# Altium PCB PCBv2.PcbDoc
Units mm, origin at the board's own origin, x right, y up, seen from the top; angles counter-clockwise.
Board outline 110 x 98 mm, 2 copper layers (Top Layer, Bottom Layer); 74 components, 67 nets, 275 pads, 22 vias.
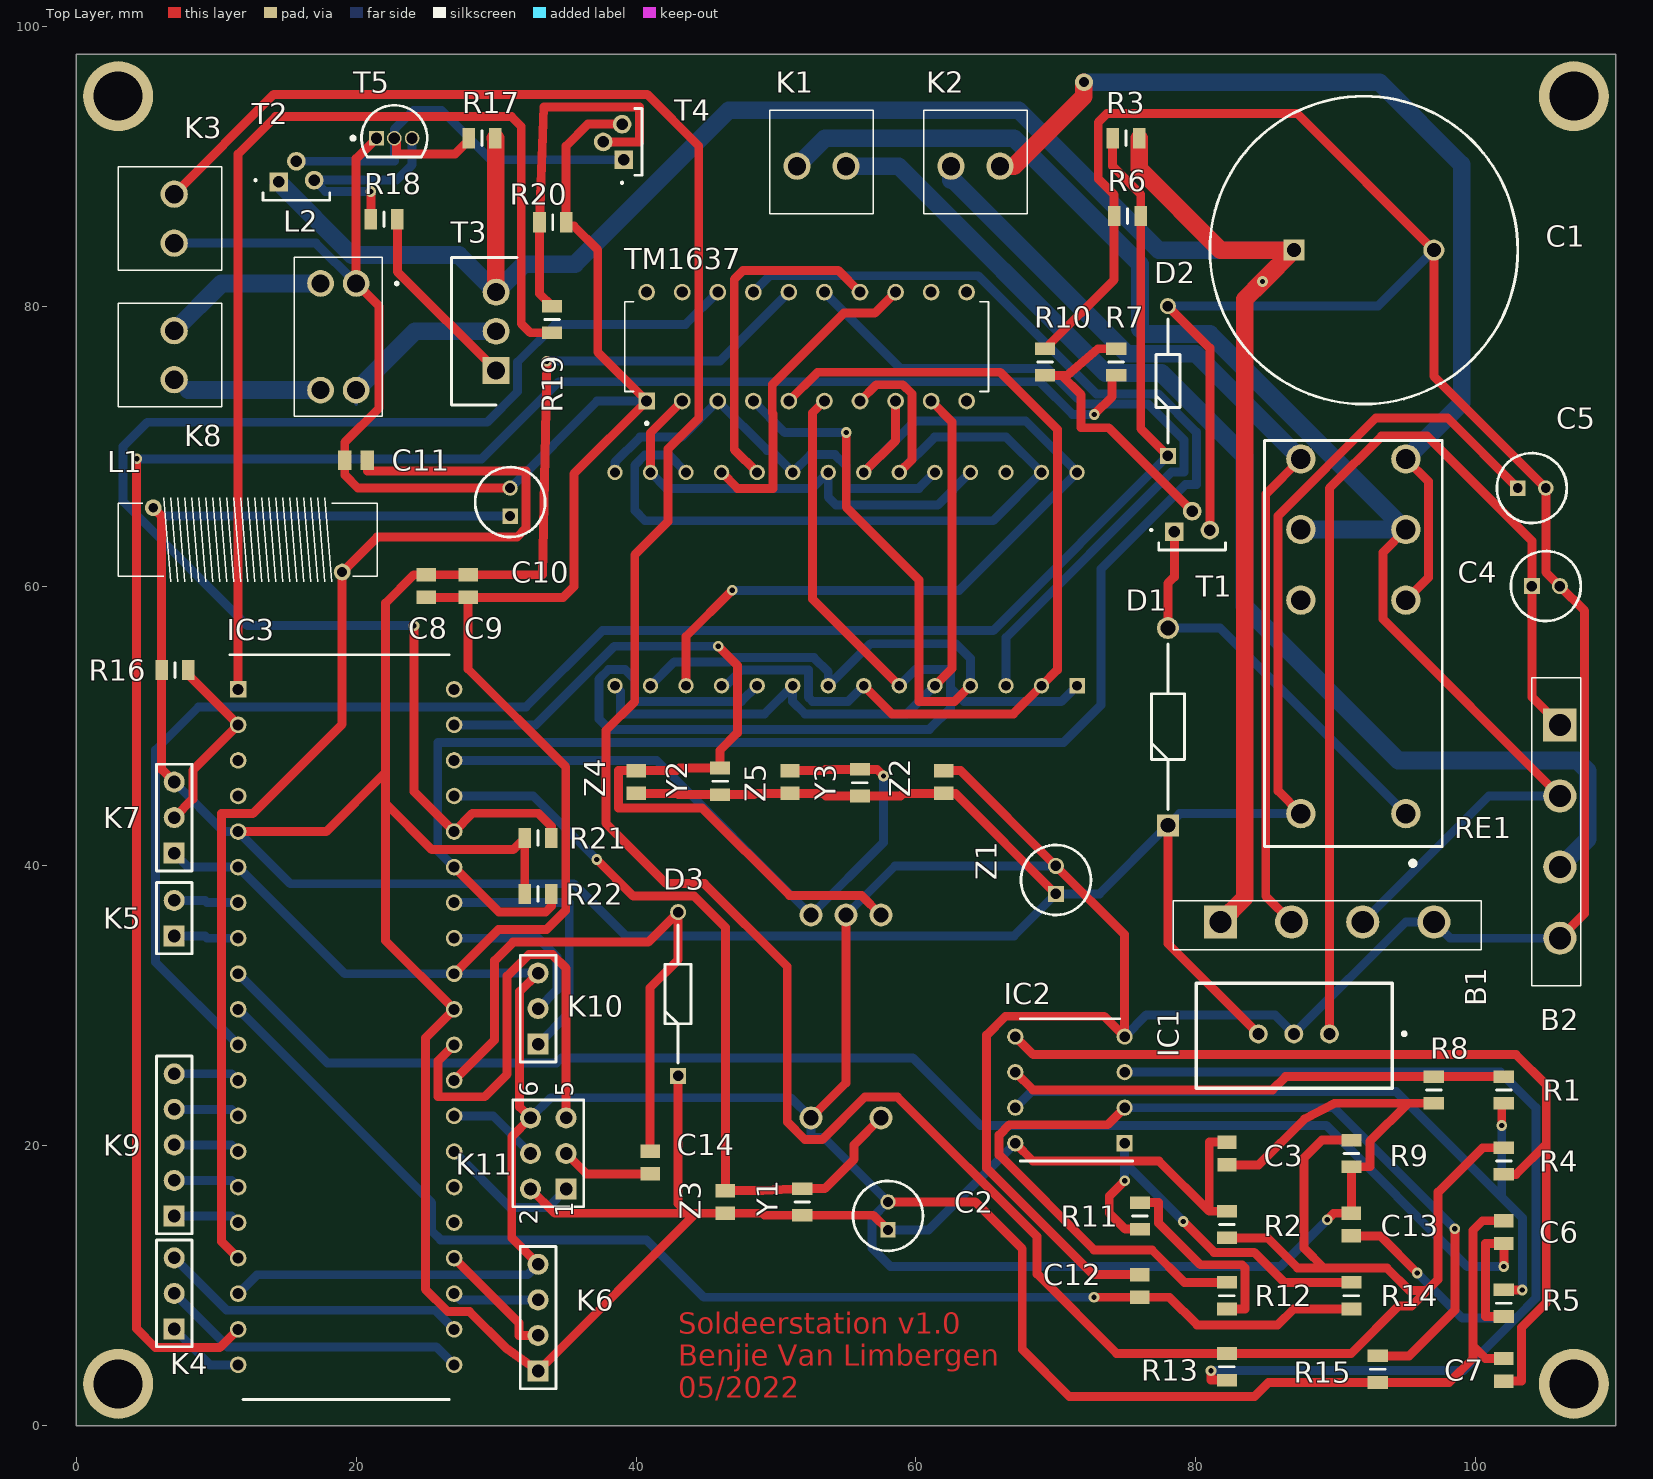
[diagram p0: Top Layer view]
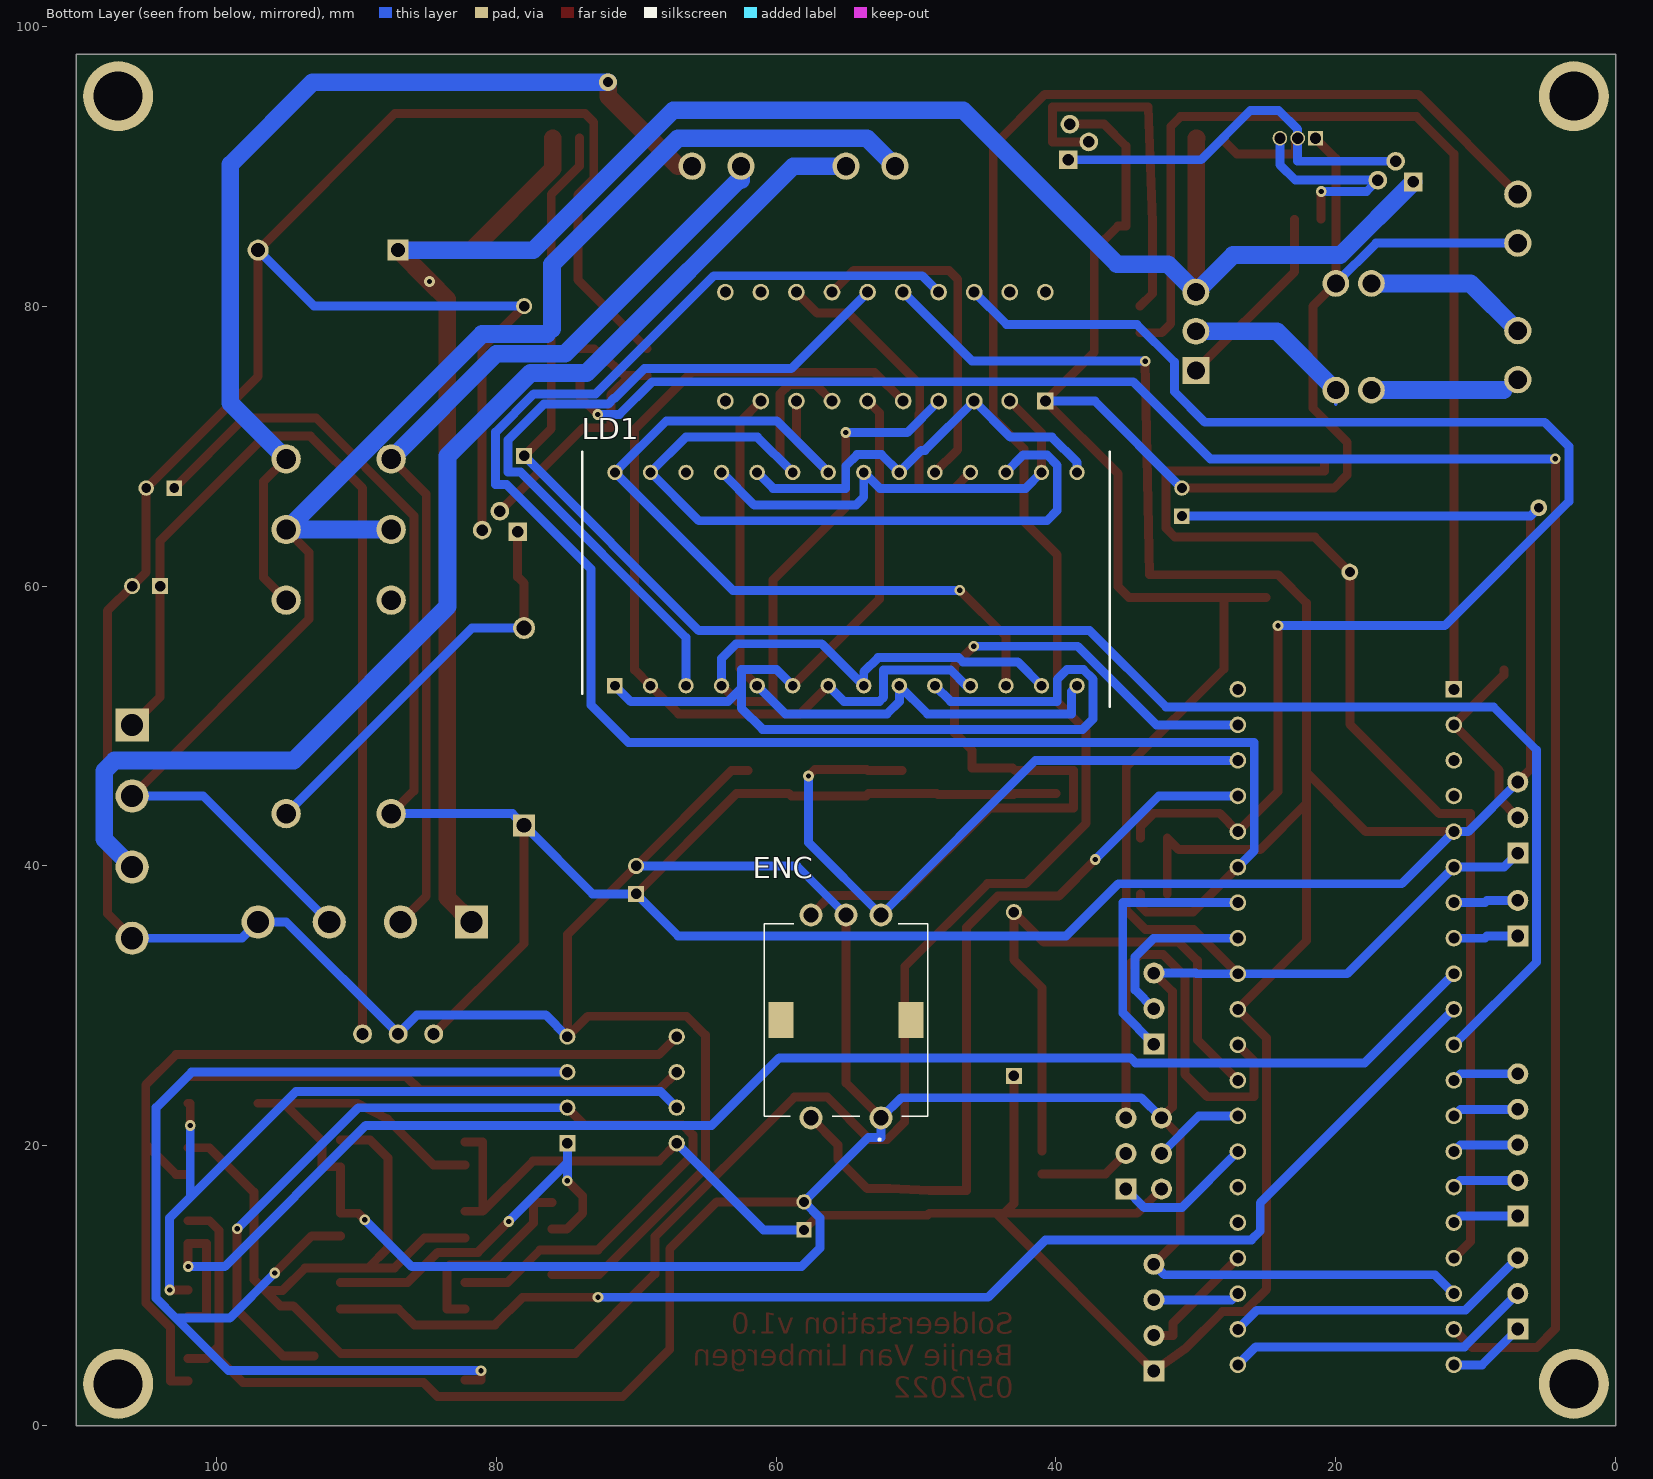
[diagram p1: Bottom Layer view, seen from below]

## Layer stack, top to bottom
Top Solder: solder mask 0.0102, Solder Resist, Dk 3.5
Top Layer: signal copper 0.0356
Dielectric 1: dielectric 0.32, FR-4, Dk 4.8
Bottom Layer: signal copper 0.0356
Bottom Solder: solder mask 0.0102, Solder Resist, Dk 3.5

## Board outline
0,0 0,98 110,98 110,0

## Design rules (kind name [scope] priority, off if disabled: settings)
Clearance [All] p1: gap=0 ignorepadtopadclearanceinfootprint=FALSE
Height [All] p1: minheight=0 maxheight=50.8 prefheight=12.7
PolygonConnect [All] p1: connectstyle=Relief reliefconductorwidth=0.254 reliefentries=4 polygonreliefangle="90 Angle" airgapwidth=0.254
RoutingVias [All] p1: holewidth=0.381 width=0.762 viastyle="Through Hole" minholewidth=0.381 minwidth=0.762 maxholewidth=0.381 maxwidth=0.762
SilkToSilkClearance [All] p1: silktosilkclearance=0.127
SilkToSolderMaskClearance [IsPad] p1: minsilkscreentomaskgap=0.127 clearancetoexposedcopper=TRUE
SolderMaskExpansion [All] p1: expansion=0.102 istentingtop=FALSE
Width [InNet('VIN')] p1: maxlimit=1.27 minlimit=1.27 preferedwidth=1.27 minimp=50.000000 maximp=50.000000 favimp=50.000000
27 further rules are at their usual default settings.

## Classes and differential pairs
component class voeding: B1 B2 C1 C4 C5 D1 D2 IC1 K1 K2 R3 R6 R7 R10 RE1 T1
component class opamps: C2 C3 C6 C7 C12 C13 IC2 K3 R1 R2 R4 R5 R8 R9 R11 R12 R13 R14 R15
component class main: C8 C9 C10 C11 C14 D3 IC3 K4 K5 K6 K7 K8 K9 K10 K11 L1 L2 R16 R17 R18 R19 R20 R21 R22 T2 T3 T4 T5
component class display: ENC LD1 TM1637 Y1 Y2 Y3 Z1 Z2 Z3 Z4 Z5

## Components (designator, comment, footprint, x,y, rotation, side; value= is the part's Value field where it differs from the comment)
B1 "GBU6J" GBU6J 81.76,36 r180 top
B2 "GBU6J" GBU6J 106,50.08 r90 top
C1 "860010683032" CAPPRD1000W80D2200H4100 87,84 r0 top
C2 "860240672002" CAPPRD200W52D500H1250 58,14 r90 top
C3 "885012207098" CAPC2012X90N 82.22,19.46 r90 top
C4 "100uF" CAPPRD200W55D500H1200 104,60 r0 top
C5 "860010683032" CAPPRD200W52D500H1250 103,67 r0 top
C6 "885012205067" CAPC2012X90N 102,13.84 r90 top
C7 "885012205067" CAPC2012X90N 102,4 r90 top
C8 "885012207098" CAPC2012X90N 25,60 r90 top
C9 "885012207098" CAPC2012X90N 28,60 r90 top
C10 "860240672002" CAPPRD200W52D500H1250 31,65 r90 top
C11 "885012207098" CAPC2012X90N 20,69 r0 top
C12 "885012205067" CAPC2012X90N 76,10 r90 top
C13 "885012205067" CAPC2012X90N 91.11,14.38 r90 top
C14 "885012207092" CAPC2012X90N 41,18.81 r90 top
D1 "1N4007" DIOAD1410W86L470D235 78,42.9 r90 top
D2 "1N5231BTR" DIOAD1068W53L380D172 78,69.3 r90 top
D3 "1N4148" DIOAD1165W56L425D185 43,25 r90 top
ENC "482016514001" 482016514001 55,29 r90 bottom locked
IC1 "TSR_2-2450" TSR-2 94.04,24.11 r180 top
IC2 "MCP6002-E_P" DIP781W56P254L950H533Q8N 71,24 r180 top
IC3 "ATMEGA4809-PF" DIP1543W58P254L5175H635Q40N 19.285,28.49 r0 top
K1 "691214110002" 691214110002 51.5,90 r0 top
K2 "691214110002" 691214110002 62.5,90 r0 top
K3 "691214110002" 691214110002 7,84.5 r90 top
K4 "61300311121" HDR1X3 7,6.92 r90 top
K5 "61300211121" HDR1X2 7,35 r90 top
K6 "61000418221" HDR1X4 33,3.92 r90 top
K7 "61300311121" HDR1X3 7,40.92 r90 top
K8 "691214110002" 691214110002 7,74.746 r90 top
K9 "61300511121" HDR1X5 7,14.994 r90 top
K10 "61300311121" HDR1X3 33,27.271 r90 top
K11 "61000621121" HDR2X3 35,16.92 r90 top
L1 "744711003" 744711003 19,61 r180 top
L2 "CM2545X171B-10" CM2545X171B10 20,81.62 r180 top
LD1 "LB-603MF" DIP1524W50P254L3750H820Q28N 55,60.5 r90 bottom locked
R1 "smd" RESC2012X60N 102,24 r90 top
R2 "smd" RESC2012X60N 82.22,14.38 r90 top
R3 "CRCW08051M00JNEAC" RESC2012X60N 75,92 r0 top
R4 "smd" RESC2012X60N 102,18.92 r90 top
R5 "smd" RESC2012X60N 102,8.76 r90 top
R6 "CRCW08051M00JNEAC" RESC2012X60N 75.11,86.434 r0 top
R7 "CRCW08051M00JNEAC" RESC2012X60N 74.3,76.004 r90 top
R8 "smd" RESC2012X60N 97,24 r90 top
R9 "smd" RESC2012X60N 91.11,19.46 r90 top
R10 "CRCW08051M00JNEAC" RESC2012X60N 69.22,76.004 r90 top
R11 "smd" RESC2012X60N 76,15 r90 top
R12 "smd" RESC2012X60N 82.22,9.3 r90 top
R13 "smd" RESC2012X60N 82.22,4.22 r90 top
R14 "smd" RESC2012X60N 91.11,9.3 r90 top
R15 "smd" RESC2012X60N 93,4.05 r90 top
R16 "C" RESC2012X60N 7.05,54 r0 top
R17 "smd" RESC2012X60N 29,92 r0 top
R18 "smd" RESC2012X60N 22,86.209 r0 top
R19 "smd" RESC2012X60N 34,79.05 r90 top
R20 "smd" RESC2012X60N 34.05,86 r0 top
R21 "CRCW08051M00JNEAC" RESC2012X60N 33,42 r0 top
R22 "CRCW08051M00JNEAC" RESC2012X60N 33,38 r0 top
RE1 "RT424005" RT42 91.25,43.74 r90 top (schematic designator X1)
T1 "BC547CBU" BC547CBU 78.46,64 r0 top
T2 "BC547CBU" BC547CBU 14.46,89 r0 top
T3 "IRF9Z34NPBF" TO254P469X1042X1967-3P 30,75.666 r90 top
T4 "BC547CBU" BC547CBU 39,90.46 r90 top
T5 "BC557CG" ONSC-TO-92-3-29-11 22.73,92 r0 top
TM1637 "*" DIP778W43P254L2612H431Q20N 52.19,77.11 r90 top
Y1 "ESR10EZPJ183" RESC2012X60N 51.875,16 r90 top
Y2 "ESR10EZPJ183" RESC2012X60N 46,46.05 r90 top
Y3 "ESR10EZPJ183" RESC2012X60N 56,45.95 r90 top
Z1 "860010683032" CAPPRD200W55D500H1200 70,38 r90 top
Z2 "860240672002" CAPC2012X90N 62,46 r90 top
Z3 "100uF" CAPC2012X90N 46.375,16 r90 top
Z4 "100uF" CAPC2012X90N 40,46 r90 top
Z5 "100uF" CAPC2012X90N 51,46 r90 top

## Footprints (in the part's own frame and the unit in brackets; to place one, negate y for a bottom-side part, rotate by r counter-clockwise, add the part's x,y. Pads: shape width x height; smd on the part's side, far side on the other; paste and mask are expansions set on the pad)
744711003 [mm]
  round 1.2 hole 0.7: 1(0,0) 2(13.5,-4.6)
  silkscreen extent -2.5,-5.3 16,0.7, body extent -2.5,-4.9 16,0.3, height 6.3
482016514001 [mm]
  round 1.65 hole 1.1: 1(-7,-2.5) 2(-7,2.5) 3(7.5,-2.5) 4(7.5,0) 5(7.5,2.5)
  rect 2.6x1.8 smd: MP1(0,-4.65) MP2(0,4.65)
  silkscreen extent -8.6,-5.85 6.88,5.85, body extent -7.45,-5.85 7.95,5.85, height 27
691214110002 [mm]
  round 1.95 hole 1.3: 1(0,0) 2(3.5,0)
  silkscreen extent -1.95,-3.4 5.45,4, body extent -1.95,-3.4 5.45,4, height 8.8
BC547CBU [mm]
  rect 1.333x1.333 hole 0.82: 1(0,-0.127)
  round 1.333 hole 0.82: 2(1.27,1.35) 3(2.54,0)
  silkscreen extent -1.7,-1.43 3.65,0.05, body extent -1.11,-1.43 3.65,2.19, height 5.43
CAPC2012X90N [mm]
  rect 0.96x1.39 smd: 1(-0.81,0) 2(0.81,0)
  body extent -1,-0.63 1,0.63, height 0.9
CAPPRD200W52D500H1250 [mm]
  rect 1.1x1.1 hole 0.7: 1(0,0)
  round 1.1 hole 0.7: 2(2,0)
  silkscreen extent -1.5,-2.5 3.5,2.5, body extent -1.75,-2.75 3.75,2.75, height 12.5
CAPPRD200W55D500H1200 [mm]
  rect 1.15x1.15 hole 0.75: 1(0,0)
  round 1.15 hole 0.75: 2(2,0)
  silkscreen extent -1.5,-2.5 3.5,2.5, body extent -1.75,-2.75 3.75,2.75, height 12
CAPPRD1000W80D2200H4100 [mm]
  rect 1.5x1.5 hole 1: 1(0,0)
  round 1.5 hole 1: 2(10,0)
  silkscreen extent -6,-11 16,11, body extent -6.25,-11.25 16.25,11.25, height 41
CM2545X171B10 [mm]
  round 1.905 hole 1.27: 1(0,0) 2(2.54,0) 3(2.54,7.62) 4(0,7.62)
  silkscreen extent -3,-1.88 4.42,9.5, body extent -1.88,-1.88 4.42,9.5, height 9.6
DIOAD1068W53L380D172 [mm]
  rect 1.15x1.15 hole 0.75: 1(0,0)
  round 1.15 hole 0.75: 2(10.7,0)
  silkscreen extent 0.93,-0.86 9.78,0.86, body extent -0.26,-0.95 10.95,0.95, height 1.9
DIOAD1165W56L425D185 [mm]
  rect 1.15x1.15 hole 0.75: 1(0,0)
  round 1.15 hole 0.75: 2(11.7,0)
  silkscreen extent 0.93,-0.93 10.78,0.92, body extent -0.28,-0.92 11.93,0.92, height 1.84
DIOAD1410W86L470D235 [mm]
  rect 1.575x1.575 hole 1.05: 1(0,0)
  round 1.575 hole 1.05: 2(14.1,0)
  silkscreen extent 1.14,-1.18 12.96,1.18, body extent -0.43,-1.35 14.53,1.35, height 2.69
DIP778W43P254L2612H431Q20N [mm] "TM1637"
  rect 1.19x1.19 hole 0.79: 1(-3.89,11.43)
  round 1.19 hole 0.79: 2(-3.89,8.89) 3(-3.89,6.35) 4(-3.89,3.81) 5(-3.89,1.27) 6(-3.89,-1.27) 7(-3.89,-3.81) 8(-3.89,-6.35) 9(-3.89,-8.89) 10(-3.89,-11.43) 11(3.89,-11.43) 12(3.89,-8.89) 13(3.89,-6.35) 14(3.89,-3.81) 15(3.89,-1.27) 16(3.89,1.27) 17(3.89,3.81) 18(3.89,6.35) 19(3.89,8.89) 20(3.89,11.43)
  silkscreen extent -5.58,-13 3.2,13, body extent -4.03,-13 4.03,13, height 4.31
DIP781W56P254L950H533Q8N [mm]
  rect 1.158x1.158 hole 0.758: 1(-3.905,3.81)
  round 1.158 hole 0.758: 2(-3.905,1.27) 3(-3.905,-1.27) 4(-3.905,-3.81) 5(3.905,-3.81) 6(3.905,-1.27) 7(3.905,1.27) 8(3.905,3.81)
  silkscreen extent -4.48,-5.08 3.56,5.08, body extent -4.04,-4.75 4.04,4.75, height 5.33
DIP1524W50P254L3750H820Q28N [mm]
  rect 1.1x1.1 hole 0.7: 1(-7.62,16.51)
  round 1.1 hole 0.7: 2(-7.62,13.97) 3(-7.62,11.43) 4(-7.62,8.89) 5(-7.62,6.35) 6(-7.62,3.81) 7(-7.62,1.27) 8(-7.62,-1.27) 9(-7.62,-3.81) 10(-7.62,-6.35) 11(-7.62,-8.89) 12(-7.62,-11.43) 13(-7.62,-13.97) 14(-7.62,-16.51) 15(7.62,-16.51) 16(7.62,-13.97) 17(7.62,-11.43) 18(7.62,-8.89) 19(7.62,-6.35) 20(7.62,-3.81) 21(7.62,-1.27) 22(7.62,1.27) 23(7.62,3.81) 24(7.62,6.35) 25(7.62,8.89) 26(7.62,11.43) 27(7.62,13.97) 28(7.62,16.51)
  silkscreen extent -9.1,-18.85 9.1,18.85, body extent -9,-18.75 9,18.75, height 8.2
DIP1543W58P254L5175H635Q40N [mm]
  rect 1.184x1.184 hole 0.784: 1(-7.715,24.13)
  round 1.184 hole 0.784: 2(-7.715,21.59) 3(-7.715,19.05) 4(-7.715,16.51) 5(-7.715,13.97) 6(-7.715,11.43) 7(-7.715,8.89) 8(-7.715,6.35) 9(-7.715,3.81) 10(-7.715,1.27) 11(-7.715,-1.27) 12(-7.715,-3.81) 13(-7.715,-6.35) 14(-7.715,-8.89) 15(-7.715,-11.43) 16(-7.715,-13.97) 17(-7.715,-16.51) 18(-7.715,-19.05) 19(-7.715,-21.59) 20(-7.715,-24.13) 21(7.715,-24.13) 22(7.715,-21.59) 23(7.715,-19.05) 24(7.715,-16.51) 25(7.715,-13.97) 26(7.715,-11.43) 27(7.715,-8.89) 28(7.715,-6.35) 29(7.715,-3.81) 30(7.715,-1.27) 31(7.715,1.27) 32(7.715,3.81) 33(7.715,6.35) 34(7.715,8.89) 35(7.715,11.43) 36(7.715,13.97) 37(7.715,16.51) 38(7.715,19.05) 39(7.715,21.59) 40(7.715,24.13)
  silkscreen extent -8.31,-26.61 7.37,26.61, body extent -7.86,-25.88 7.86,25.88, height 6.35
GBU6J [mm]
  rect 2.37x2.37 hole 1.58: 1(0,0)
  round 2.37 hole 1.58: 2(-5.08,0) 3(-10.16,0) 4(-15.24,0)
  silkscreen extent -18.62,-1.5 3.38,2, body extent -18.62,-1.5 3.38,2, height 18.9
HDR1X2 [mm] "Connector; Header; 2 Position"
  rect 1.5x1.5 hole 0.9: 1(0,0)
  round 1.5 hole 0.9: 2(2.54,0)
  silkscreen extent -1.27,-1.27 3.81,1.27
HDR1X3 [mm] "Connector; Header; 3 Position"
  rect 1.5x1.5 hole 0.9: 1(0,0)
  round 1.5 hole 0.9: 2(2.54,0) 3(5.08,0)
  silkscreen extent -1.27,-1.27 6.35,1.27
HDR1X4 [mm] "Connector; Header; 4 Position"
  rect 1.5x1.5 hole 0.9: 1(0,0)
  round 1.5 hole 0.9: 2(2.54,0) 3(5.08,0) 4(7.62,0)
  silkscreen extent -1.27,-1.27 8.89,1.27
HDR1X5 [mm] "Connector; Header; 5 Position"
  rect 1.5x1.5 hole 0.9: 1(0,0)
  round 1.5 hole 0.9: 2(2.54,0) 3(5.08,0) 4(7.62,0) 5(10.16,0)
  silkscreen extent -1.27,-1.27 11.43,1.27
HDR2X3 [mm] "Connector; Header; 3x2 Position"
  rect 1.5x1.5 hole 0.9: 1(0,0)
  round 1.5 hole 0.9: 2(0,2.54) 3(2.54,0) 4(2.54,2.54) 5(5.08,0) 6(5.08,2.54)
  silkscreen extent -1.27,-1.27 6.35,3.81
ONSC-TO-92-3-29-11 [mm] "TO, 3-Leads, Body Dia 4.7mm, Pitch 1.27mm"
  rect 1.05x1.05 hole 0.8: 1(-1.27,0)
  round 1.05 hole 0.8: 2(0,0) 3(1.27,0)
  silkscreen extent -3.07,-1.34 2.35,2.35, body extent -2.35,-1.33 2.36,2.36, height 7.87
RESC2012X60N [mm]
  rect 0.9x1.45 smd: 1(-0.95,0) 2(0.95,0)
  silkscreen extent 0,-0.53 0,0.53, body extent -1,-0.63 1,0.63, height 0.6
RT42 [mm]
  round 2.1 hole 1.4: 1(0,-3.75) 2(15.26,-3.75) 3(20.3,-3.75) 4(25.34,-3.75) 5(25.34,3.75) 6(20.3,3.75) 7(15.26,3.75) 8(0,3.75)
  silkscreen extent -3.67,-6.35 26.65,6.35, body extent -2.21,-6.35 26.79,6.35, height 15.86
TO254P469X1042X1967-3P [mm]
  rect 1.92x1.92 hole 1.28: 1(-0.254,0)
  round 1.92 hole 1.28: 2(2.54,0) 3(5.334,0)
  silkscreen extent -2.73,-1.49 7.81,3.2, body extent -2.67,-1.5 7.75,3.19, height 18.84
TSR-2 [mm]
  round 1.35 hole 0.85: 1(4.5,-3.89) 2(7.04,-3.89) 3(9.58,-3.89)
  silkscreen extent -0.96,-7.5 14,0, body extent 0.01,-7.5 14.01,0, height 10.33

## Part data
B1 B2: "Bridge Rectifier", Manufacturer_Name="GeneSiC Semiconductor", Datasheet Link=https://www.diodemodule.com/silicon_products/bridge_rectifiers/gbu6j.pdf, Height=18.8mm, Manufacturer_Part_Number=GBU6J
C1: "Capacitor C1 4700u 50v", Manufacturer_Name="Wurth Elektronik", Datasheet Link=https://componentsearchengine.com/Datasheets/2/860010683032.pdf, Height=41mm, Manufacturer_Part_Number=860010683032
C2: "Capacitor Polarised 10uf 50v stee 2mm 5x11mm", Manufacturer_Name="Wurth Elektronik", Datasheet Link=https://katalog.we-online.de/pbs/datasheet/860240672002.pdf, Height=12.5mm, Manufacturer_Part_Number=860240672002
C3: "Capacitor, C3,C8,C9,C11,C14 100nf", Manufacturer_Name="Wurth Elektronik", Mouser2 Part Number=710-885012207098, Datasheet Link=https://componentsearchengine.com//885012207098.pdf, Height=0.9mm, Manufacturer_Part_Number=885012207098, Mouser2 Price/Stock=https://www.mouser.com/Search/Refine.aspx?Keyword=710-885012207098
C4: library part ECA-1HHG2R2B, "Capacitor Polarised C4", Manufacturer_Name=Panasonic, Datasheet Link=http://industrial.panasonic.com/cdbs/www-data/pdf/RDF0000/ABA0000C1215.pdf, Height=12mm, Manufacturer_Part_Number=ECA-1HHG2R2B
C5: "Capacitor C5", Manufacturer_Name="Wurth Elektronik", Datasheet Link=https://componentsearchengine.com/Datasheets/2/860010683032.pdf, Height=41mm, Manufacturer_Part_Number=860010683032
C6 C7 C12 C13: "Capacitor C6, C7, C12,C13", Manufacturer_Name="Wurth Elektronik", Datasheet Link=https://katalog.we-online.com/pbs/datasheet/885012205067.pdf, Height=0.55mm, Manufacturer_Part_Number=885012205067
C8 C9 C11: "Capacitor, C3,C8,C9,C11,C14", Manufacturer_Name="Wurth Elektronik", Mouser2 Part Number=710-885012207098, Datasheet Link=https://componentsearchengine.com//885012207098.pdf, Height=0.9mm, Manufacturer_Part_Number=885012207098, Mouser2 Price/Stock=https://www.mouser.com/Search/Refine.aspx?Keyword=710-885012207098
C10: "Capacitor Polarised c10", Manufacturer_Name="Wurth Elektronik", Datasheet Link=https://katalog.we-online.de/pbs/datasheet/860240672002.pdf, Height=12.5mm, Manufacturer_Part_Number=860240672002
C14: "Capacitor c14 100n", Manufacturer_Name="Wurth Elektronik", Datasheet Link=https://katalog.we-online.com/pbs/datasheet/885012207092.pdf, Height=0.9mm, Manufacturer_Part_Number=885012207092
D1: "Diode D1", Manufacturer_Name=MULTICOMP, Datasheet Link=http://www.farnell.com/datasheets/1505911.pdf?_ga=2.248087493.396773729.1562531485-167411096.1502103357, Manufacturer_Part_Number=1N4007
D2: "Zener Diode D2", Manufacturer_Name="ON Semiconductor", Datasheet Link=https://componentsearchengine.com/Datasheets/1/1N5231BTR.pdf, Manufacturer_Part_Number=1N5231BTR
D3: "Diode D3", Manufacturer_Name=Nexperia, Datasheet Link=https://datasheet.datasheetarchive.com/originals/distributors/Datasheets-112/DSAP0040891.pdf, Manufacturer_Part_Number=1N4148
ENC: "Switch", Manufacturer_Name="Wurth Elektronik", Mouser2 Part Number=710-482016514001, Datasheet Link=https://componentsearchengine.com//482016514001.pdf, Height=26.9mm, Manufacturer_Part_Number=482016514001, Mouser2 Price/Stock=https://www.mouser.com/Search/Refine.aspx?Keyword=710-482016514001
IC1: "Power Supply IC1", Manufacturer_Name="Traco Power", Manufacturer_Part_Number="TSR 2-2450", Mouser2 Part Number=495-TSR2-2450, Datasheet Link="https://componentsearchengine.com//TSR 2-2450.pdf", Mouser2 Price/Stock=https://www.mouser.com/Search/Refine.aspx?Keyword=495-TSR2-2450
IC2: "IC Dual Opamp", Manufacturer_Name=Microchip, Manufacturer_Part_Number=MCP6002-E/P, Mouser2 Part Number=579-MCP6002-E/P, Datasheet Link=https://componentsearchengine.com//MCP6002-E_P.pdf, Height=5.334mm, Mouser2 Price/Stock=https://www.mouser.com/Search/Refine.aspx?Keyword=579-MCP6002-E%2FP
IC3: "Integrated Circuit", Manufacturer_Name=Microchip, Mouser2 Part Number=556-ATMEGA4809-PF, Datasheet Link=https://componentsearchengine.com//ATMEGA4809-PF.pdf, Height=6.35mm, Manufacturer_Part_Number=ATMEGA4809-PF, Mouser2 Price/Stock=https://www.mouser.com/Search/Refine.aspx?Keyword=556-ATMEGA4809-PF
K1 K2 K8: "Connector", Manufacturer_Name="Wurth Elektronik", Height=8.7mm, Manufacturer_Part_Number=691214110002
K3: "Connector K3", Manufacturer_Name="Wurth Elektronik", Height=8.7mm, Manufacturer_Part_Number=691214110002
K4 K7: "WR-PHD Pin Header, THT, pitch 2.54mm, Single Row, Vertical, 3p", Contact Resistance=20mOhm, Manufacturer="Wurth Elektronik", Operating Temperature="-40 to +105degC", Rated Current=3A, Withstanding Voltage=500VAC, Working Voltage=250VAC, ComponentLink1Description=Manufacturer, ComponentLink1URL=http://www.we-online.de, ComponentLink2Description=Datasheet, ComponentLink2URL=https://www.we-online.com/catalog/datasheet/61300311121.pdf, Gender="Pin Header", Manufacturer Part Number=61300311121, Mounting Technology=THT, Orientation=Vertical, Packaging=Bag, Pin Number=3, Pitch=2.54mm, Row Number=Single
K5: "WR-PHD Pin Header, THT, pitch 2.54mm, Single Row, Vertical, 2p", Contact Resistance=20mOhm, Manufacturer="Wurth Elektronik", Operating Temperature="-40 to +105degC", Rated Current=3A, Withstanding Voltage=500VAC, Working Voltage=250VAC, ComponentLink1Description=Manufacturer, ComponentLink1URL=http://www.we-online.de, ComponentLink2Description=Datasheet, ComponentLink2URL=https://www.we-online.com/catalog/datasheet/61300211121.pdf, Gender="Pin Header", Manufacturer Part Number=61300211121, Mounting Technology=THT, Orientation=Vertical, Packaging=Bag, Pin Number=2, Pitch=2.54mm, Row Number=Single
K6: "4p Header K6", Contact Resistance=20mOhm, Manufacturer="Wurth Elektronik", Operating Temperature="-40 to +125degC", Rated Current=3A, Withstanding Voltage=500VAC, Working Voltage=250VAC, ComponentLink1Description=Manufacturer, ComponentLink1URL=http://www.we-online.de, ComponentLink2Description=Datasheet, ComponentLink2URL=https://www.we-online.com/catalog/datasheet/61000418221.pdf, Gender="Pin Header", Manufacturer Part Number=61000418221, Mounting Technology=SMT, Orientation=Vertical, Packaging=Tube, Pin Number=4, Pitch=2.54mm, Row Number=Single
K9: "5P Header k9", Contact Resistance=20mOhm, Manufacturer="Wurth Elektronik", Operating Temperature="-40 to +105degC", Rated Current=3A, Withstanding Voltage=500VAC, Working Voltage=250VAC, ComponentLink1Description=Manufacturer, ComponentLink1URL=http://www.we-online.de, ComponentLink2Description=Datasheet, ComponentLink2URL=https://www.we-online.com/catalog/datasheet/61300511121.pdf, Gender="Pin Header", Manufacturer Part Number=61300511121, Mounting Technology=THT, Orientation=Vertical, Packaging=Bag, Pin Number=5, Pitch=2.54mm, Row Number=Single
K10: "3p header K10", Contact Resistance=20mOhm, Manufacturer="Wurth Elektronik", Operating Temperature="-40 to +105degC", Rated Current=3A, Withstanding Voltage=500VAC, Working Voltage=250VAC, ComponentLink1Description=Manufacturer, ComponentLink1URL=http://www.we-online.de, ComponentLink2Description=Datasheet, ComponentLink2URL=https://www.we-online.com/catalog/datasheet/61300311121.pdf, Gender="Pin Header", Manufacturer Part Number=61300311121, Mounting Technology=THT, Orientation=Vertical, Packaging=Bag, Pin Number=3, Pitch=2.54mm, Row Number=Single
K11: "WR-PHD Pin Header, SMT, pitch 2.54mm, Dual Row, Vertical, 6p", Contact Resistance=20mOhm, Manufacturer="Wurth Elektronik", Operating Temperature="-40 to +125degC", Rated Current=3A, Withstanding Voltage=500VAC, Working Voltage=250VAC, ComponentLink1Description=Manufacturer, ComponentLink1URL=http://www.we-online.de, ComponentLink2Description=Datasheet, ComponentLink2URL=https://www.we-online.com/catalog/datasheet/61000621121.pdf, Gender="Pin Header", Manufacturer Part Number=61000621121, Mounting Technology=SMT, Orientation=Vertical, Packaging=Tube, Pin Number=6, Pitch=2.54mm, Row Number=Dual
L1: "Inductor, Smoorspoel 10uH", Manufacturer_Name="Wurth Elektronik", Datasheet Link=https://www.we-online.de/katalog/datasheet/744711003.pdf, Height=6.2mm, Manufacturer_Part_Number=744711003
L2: "Transformer", Manufacturer_Name="Laird Technologies", Datasheet Link=https://datasheet.datasheetarchive.com/originals/dk/DKDS-7/122753.pdf, Height=9.5mm, Manufacturer_Part_Number=CM2545X171B-10
LD1: "Display", Manufacturer_Name="ROHM Semiconductor", Datasheet Link=https://datasheet.datasheetarchive.com/originals/distributors/Datasheets_SAMA/27b839e3b28040d1ff79b0bfb62b7eff.pdf, Height=8.2mm, Manufacturer_Part_Number=LB-603MF
R1 R4 R5 R8 R18: library part CRCW08051M00JNEAC, "100k", Manufacturer_Name=Vishay, Mouser2 Part Number=71-CRCW08051M00JNEAC, Datasheet Link=https://componentsearchengine.com//CRCW08051M00JNEAC.pdf, Height=0.6mm, Manufacturer_Part_Number=CRCW08051M00JNEAC, Mouser2 Price/Stock=https://www.mouser.com/Search/Refine.aspx?Keyword=71-CRCW08051M00JNEAC
R2: library part CRCW08051M00JNEAC, "1m", Manufacturer_Name=Vishay, Mouser2 Part Number=71-CRCW08051M00JNEAC, Datasheet Link=https://componentsearchengine.com//CRCW08051M00JNEAC.pdf, Height=0.6mm, Manufacturer_Part_Number=CRCW08051M00JNEAC, Mouser2 Price/Stock=https://www.mouser.com/Search/Refine.aspx?Keyword=71-CRCW08051M00JNEAC
R3 R6 R7 R10 R21 R22: "Resistor R1-22", Manufacturer_Name=Vishay, Mouser2 Part Number=71-CRCW08051M00JNEAC, Datasheet Link=https://componentsearchengine.com//CRCW08051M00JNEAC.pdf, Height=0.6mm, Manufacturer_Part_Number=CRCW08051M00JNEAC, Mouser2 Price/Stock=https://www.mouser.com/Search/Refine.aspx?Keyword=71-CRCW08051M00JNEAC
R9: library part CRCW08051M00JNEAC, "10m", Manufacturer_Name=Vishay, Mouser2 Part Number=71-CRCW08051M00JNEAC, Datasheet Link=https://componentsearchengine.com//CRCW08051M00JNEAC.pdf, Height=0.6mm, Manufacturer_Part_Number=CRCW08051M00JNEAC, Mouser2 Price/Stock=https://www.mouser.com/Search/Refine.aspx?Keyword=71-CRCW08051M00JNEAC
R11 R12: library part CRCW08051M00JNEAC, "18k", Manufacturer_Name=Vishay, Mouser2 Part Number=71-CRCW08051M00JNEAC, Datasheet Link=https://componentsearchengine.com//CRCW08051M00JNEAC.pdf, Height=0.6mm, Manufacturer_Part_Number=CRCW08051M00JNEAC, Mouser2 Price/Stock=https://www.mouser.com/Search/Refine.aspx?Keyword=71-CRCW08051M00JNEAC
R13 R14: library part CRCW08051M00JNEAC, "5k6", Manufacturer_Name=Vishay, Mouser2 Part Number=71-CRCW08051M00JNEAC, Datasheet Link=https://componentsearchengine.com//CRCW08051M00JNEAC.pdf, Height=0.6mm, Manufacturer_Part_Number=CRCW08051M00JNEAC, Mouser2 Price/Stock=https://www.mouser.com/Search/Refine.aspx?Keyword=71-CRCW08051M00JNEAC
R15: library part CRCW08051M00JNEAC, "100ohm", Manufacturer_Name=Vishay, Mouser2 Part Number=71-CRCW08051M00JNEAC, Datasheet Link=https://componentsearchengine.com//CRCW08051M00JNEAC.pdf, Height=0.6mm, Manufacturer_Part_Number=CRCW08051M00JNEAC, Mouser2 Price/Stock=https://www.mouser.com/Search/Refine.aspx?Keyword=71-CRCW08051M00JNEAC
R16 R20: library part CRCW08051M00JNEAC, "Resistor R1-22 / 4k7", Manufacturer_Name=Vishay, Mouser2 Part Number=71-CRCW08051M00JNEAC, Datasheet Link=https://componentsearchengine.com//CRCW08051M00JNEAC.pdf, Height=0.6mm, Manufacturer_Part_Number=CRCW08051M00JNEAC, Mouser2 Price/Stock=https://www.mouser.com/Search/Refine.aspx?Keyword=71-CRCW08051M00JNEAC
R17: library part CRCW08051M00JNEAC, "4k7", Manufacturer_Name=Vishay, Mouser2 Part Number=71-CRCW08051M00JNEAC, Datasheet Link=https://componentsearchengine.com//CRCW08051M00JNEAC.pdf, Height=0.6mm, Manufacturer_Part_Number=CRCW08051M00JNEAC, Mouser2 Price/Stock=https://www.mouser.com/Search/Refine.aspx?Keyword=71-CRCW08051M00JNEAC
R19: library part CRCW08051M00JNEAC, "10k", Manufacturer_Name=Vishay, Mouser2 Part Number=71-CRCW08051M00JNEAC, Datasheet Link=https://componentsearchengine.com//CRCW08051M00JNEAC.pdf, Height=0.6mm, Manufacturer_Part_Number=CRCW08051M00JNEAC, Mouser2 Price/Stock=https://www.mouser.com/Search/Refine.aspx?Keyword=71-CRCW08051M00JNEAC
RE1: "Relay or Contactor", Manufacturer_Name="TE Connectivity", Mouser2 Part Number=655-RT424005, Datasheet Link=https://componentsearchengine.com//RT424005.pdf, Manufacturer_Part_Number=RT424005, Mouser2 Price/Stock=https://www.mouser.com/Search/Refine.aspx?Keyword=655-RT424005
T1 T2 T4: "Transistor BJT NPN", Manufacturer_Name="ON Semiconductor", Datasheet Link=https://www.onsemi.com/pdf/datasheet/bc550-d.pdf, Height=5.33mm, Manufacturer_Part_Number=BC547CBU
T3: "MOSFET (P-Channel)", Manufacturer_Name=Infineon, Mouser2 Part Number=942-IRF9Z34NPBF, Datasheet Link=https://componentsearchengine.com//IRF9Z34NPBF.pdf, Height=4.69mm, Manufacturer_Part_Number=IRF9Z34NPBF, Mouser2 Price/Stock=https://www.mouser.com/Search/Refine.aspx?Keyword=942-IRF9Z34NPBF
T5: library part CMP-1048-01441-1, "Amplifier Transistor, PNP Silicon, 3-Pin TO-92, Pb-Free, Bulk Box", Manufacturer="On Semiconductor", ComponentLink1Description="Manufacturer URL", ComponentLink1URL=http://www.onsemi.com/, ComponentLink2Description=Datasheet, ComponentLink2URL=http://www.onsemi.com/pub_link/Collateral/BC556B-D.PDF, ComponentLink3Description="Package Specification", ComponentLink3URL=http://www.onsemi.cn/pub_link/Collateral/2N6426-D.PDF, DatasheetVersion="Rev. 3", IC Continuous (A)=-0.1, Mounting Technology="Through Hole", PackageDescription="3-Pin Transistor Outline, Body 4.825 x 3.685 mm, Pitch 1.27 mm", PackageReference=TO-92-3-29-11_AM_SL, PackageVersion="Rev. AM", Packing="Bulk Box", PartNumber=BC557CG, Polarity=PNP, RoHS=TRUE
TM1637: library part TM1637, "LED Drive Control Special Circuit", Package=Package, Availability="Not in stock", Check_prices=https://www.snapeda.com/parts/TM1637/Titan+Micro+Electronics/view-part/?ref=eda, MF="Titan Micro Electronics", MP=TM1637, Price=None, SnapEDA_Link=https://www.snapeda.com/parts/TM1637/Titan+Micro+Electronics/view-part/?ref=snap
Y1 Y2 Y3: "Resistor SMD 0805 10k", Manufacturer_Name="ROHM Semiconductor", Datasheet Link=https://datasheet.datasheetarchive.com/originals/distributors/Datasheets_SAMA/30ccb516c688c96e56c83a00b77a93f4.pdf, Height=0.65mm, Manufacturer_Part_Number=ESR10EZPJ183
Z1: "Capacitor C1", Manufacturer_Name="Wurth Elektronik", Datasheet Link=https://componentsearchengine.com/Datasheets/2/860010683032.pdf, Height=41mm, Manufacturer_Part_Number=860010683032
Z2: "Capacitor Polarised", Manufacturer_Name="Wurth Elektronik", Datasheet Link=https://katalog.we-online.de/pbs/datasheet/860240672002.pdf, Height=12.5mm, Manufacturer_Part_Number=860240672002
Z3 Z4 Z5: library part ECA-1HHG2R2B, "Capacitor Polarised C4 3,5mm 8x11mm", Manufacturer_Name=Panasonic, Datasheet Link=http://industrial.panasonic.com/cdbs/www-data/pdf/RDF0000/ABA0000C1215.pdf, Height=12mm, Manufacturer_Part_Number=ECA-1HHG2R2B

## Free pads (board coordinates)
  round 5 hole 3.5: 1(3,3) 1(3,95) 1(107,3) 1(107,95)

## Via types
v1: diameter 0.762, hole 0.381, Top Layer to Bottom Layer, 21 vias
v2: diameter 1.27, hole 0.711, Top Layer to Bottom Layer, 1 vias

## Nets (pads, with @x,y where several pads share a name; then routed paths per layer and width w, separated by ;. In a path a pad name is that pad's centre, name@x,y a point inside that pad or via, vN(x,y) a via of type N, cw(c..) or ccw(c..) an arc to the next point about the centre after c; other vN are vias at no path point)
+5: C2.1 C3.2 C5.1 C8.2 C9.2 C10.1 D1.1 D3.1 IC1.3 IC2.8 IC3.5 IC3.31 K6.1 K7.3 K11.2 L1.2 R2.2 R16.1 R21.1 R22.1 RE1.8 TM1637.16 Y1.1 Y2.1 Y3.1 Z1.1 Z2.1 Z3.1 Z4.1 Z5.1 | length 454.1
  Top Layer w0.635: L1.2 6.1,65 R16.1 6.1,46.9 K7.3 ; IC3.5 17.856,42.46 22.098,46.702 ; R22.1 R21.1 31.223,41.173 25.4,41.173 22.098,44.475 ; K11.2 34.19,15.19 43.688,15.19 ; v1(33.63,76.073) 33.327,60.81 C9.2 C8.2 24.13,60.81 22.098,58.778 22.098,46.702 ; Z4.1 42.951,45.19 43.041,45.1 Y2.1 48.438,45.1 48.528,45.19 Z5.1 53.391,45.19 53.581,45 Y3.1 58.903,45 59.093,45.19 Z2.1 62.81,45.19 Z1.1 ; D3.1 43,15.878 43.688,15.19 ; C2.1 56.95,15.05 Y1.1 49.187,15.05 49.047,15.19 Z3.1 44.27,15.19 ; IC2.8 68.362,18.923 77.357,18.923 80.95,15.33 ; D1.1 78,34.46 IC1.3 ; R2.2 80.95,15.33 ; C3.2 80.95,20.27 80.95,15.33 ; RE1.8 85.878,45.362 85.878,65.025 92.862,72.009 97.991,72.009 C5.1 ; 22.098,44.475 22.098,46.702 ; 22.098,44.475 22.098,34.662 IC3.31 24.947,27.707 24.947,9.774 26.555,8.167 28.092,8.167 30.713,5.546 K6.1 44.27,15.19 ; 43.688,15.19 44.27,15.19
  Bottom Layer w0.635: L1.2 6.1,65 C10.1 ; K7.3 10.54,42.46 IC3.5 15.295,38.735 35.535,38.735 39.268,35.001 67.001,35.001 Z1.1 73.1,38 D1.1 78.84,43.74 RE1.8 ; v1(33.63,76.073) 45.993,76.073 TM1637.16 ; C2.1 60.905,14 IC2.8
GND: B1.4 B2.4 C1.2 C2.2 C3.1 C4.2 C5.2 C6.2 C7.2 C8.1 C9.1 C10.2 C11.1 C12.2 C13.2 D2.2 ENC.1 ENC.4 IC1.2 IC2.4 IC3.6 IC3.18 IC3.32 K3.1 K6.4 K7.1 K10.3 K11.6 L2.1 R6.1 R8.1 R9.1 R10.2 R15.1 R20.2 T1.3 T4.3 T5.1 TM1637.1 Z1.2 Z2.2 | length 658
  Top Layer w0.635: T5.1 20,90.54 L2.1 21.641,79.979 21.641,72.72 19.19,70.269 C11.1 19.19,67.945 20.135,67 C10.2 ; C8.1 C9.1@27.991,59.19 ; IC3.32 30.15,35.45 33.596,35.45 34.976,36.83 34.976,47.092 27.991,54.077 C9.1@27.991,59.19 ; K6.4 31.115,13.425 31.115,20.655 K11.6 31.674,22.786 31.674,31.025 K10.3 ; T4.3 36.56,93 35,91.44 R20.2 35,85.725 35.56,85.725 37.262,84.023 37.262,76.718 TM1637.1 35.56,68.02 35.56,59.952 34.798,59.19 C9.1 C9.1@27.991,59.19 ; ENC.1 55,24.5 ENC.4 ; C2.2 64.239,16 67.589,12.649 67.589,5.461 70.968,2.083 84.176,2.083 85.193,3.1 R15.1 98.087,3.1 99.797,4.81 99.797,5.715 ; Z2.2 63.19,46.81 Z1.2 74.905,35.095 IC2.4 73.454,29.261 66.396,29.261 65.049,27.915 65.049,18.415 72.654,10.81 C12.2 ; R10.2 74.16,81.894 R6.1 74.16,87.96 73.025,89.095 73.025,93.142 73.66,93.777 87.223,93.777 C1.2 97,75 C5.2 105,61 C4.2 107.772,58.228 107.772,36.612 B2.4 ; D2.2 81,77 T1.3 ; C3.1 84.487,18.65 87.757,21.92 89.947,23.05 95.161,23.05 ; v1(89.383,14.733) 89.84,15.19 C13.2 R9.1 92.431,18.51 92.431,20.32 95.161,23.05 ; R8.1 95.161,23.05 ; C7.2 100.702,4.81 99.797,5.715 ; C6.2 100.477,14.65 99.797,13.97 99.797,5.715
  Bottom Layer w0.635: K7.1 8,39.92 IC3.6 19.19,32.3 IC3.32 29.972,32.3 30.023,32.351 K10.3 ; K3.1 17.12,84.5 L2.1 ; IC3.18 12.925,10.795 32.255,10.795 K6.4 ; C10.2 37.22,73.22 TM1637.1 ; K11.6 33.904,23.444 51.056,23.444 ENC.1 52.5,20.599 53.401,20.599 C2.2 56.871,14.871 56.871,12.7 58.191,11.379 86.029,11.379 v1(89.383,14.733) ; ENC.4 58.5,40 Z1.2 ; IC2.4 76.457,29.362 85.638,29.362 IC1.2 95,36 B1.4 98.16,34.84 B2.4 ; D2.2 93,80 C1.2
NetB1_2: B1.2 K2.1 RE1.5 | length 69.1
  Top Layer w0.635: B1.2 84.989,37.851 84.989,66.569 RE1.5
  Bottom Layer w1.27: K2.1 62.5,89 62.681,89 75.083,76.598 79.982,76.598 RE1.5
NetB1_3: B1.3 B2.2 K1.1 RE1.3 RE1.6 | length 108.8
  Top Layer w0.635: RE1.3 93.37,62.41 93.37,57.63 B2.2
  Bottom Layer w0.635: 76,78.372 76.372,78 ; B1.3 100.92,45 B2.2 ; RE1.3@94.96,64.04 RE1.3
  Bottom Layer w1.27: K1.1 53.5,92 67,92 76,83 76,78.372 ; 76.372,78 81,78 94.96,64.04 RE1.6
NetB2_1: B2.1 C4.1 IC1.1 | length 72.1
  Top Layer w0.635: IC1.1 89.54,66.985 93.269,70.714 96.52,70.714 104,63.234 C4.1 104,52.08 B2.1
NetB2_3: B2.3 K1.2 | length 84.9
  Bottom Layer w1.27: K1.2 58.768,90 73.546,75.222 77.534,75.222 83.464,69.292 83.464,58.536 94.464,47.536 107.256,47.536 108,46.792 108,41.92 B2.3
NetC6_1: C6.1 IC3.9 R5.1 | length 108.9
  Top Layer w0.635: R5.1 100.686,7.81 100.686,13.03 C6.1 v1(102,11.379)
  Bottom Layer w0.635: IC3.9 17.937,25.933 34.315,25.933 34.671,26.289 59.766,26.289 64.592,21.463 89.306,21.463 99.39,11.379 v1(102,11.379)
NetC7_1: C7.1 IC2.5 R4.1 | length 66.5
  Top Layer w0.635: IC2.5 68.387,26.518 102.87,26.518 105.029,24.359 105.029,20.129 ; C7.1 103.276,3.19 103.276,7.036 105.029,8.788 105.029,20.129 ; R4.1 102.87,17.97 105.029,20.129
NetC11_2: C11.2 IC3.17 L1.1 | length 85
  Top Layer w0.635: IC3.17 10.389,13.161 10.389,43.739 12.598,43.739 19,50.14 L1.1 21.5,63.5 31.496,63.5 32.131,64.135 32.131,68.224 20.81,68.224 C11.2
NetC12_1: C12.1 IC3.10 R14.1 | length 90.5
  Top Layer w0.635: v1(72.72,9.19) C12.1 78.11,9.19 80.086,7.214 85.846,7.214 86.982,8.35 R14.1
  Bottom Layer w0.635: IC3.10 25.4,15.93 25.4,13.919 26.035,13.284 40.742,13.284 44.836,9.19 v1(72.72,9.19)
NetC13_1: C13.1 IC2.3 R13.1 | length 85.4
  Top Layer w0.635: v1(81.077,3.946) 81.077,3.27 R13.1 ; C13.1 93.161,13.57 v1(95.809,10.922)
  Bottom Layer w0.635: IC2.3 101.755,25.27 104.292,22.733 104.292,9.119 102.87,7.696 ; v1(81.077,3.946) 99.12,3.946 102.87,7.696 ; v1(95.809,10.922) 99.035,7.696 102.87,7.696
NetC14_1: C14.1 K11.3 | length 6.6
  Top Layer w0.635: K11.3 36.46,18 C14.1
NetC14_2: C14.2 D3.2 IC3.29 | length 42.2
  Top Layer w0.635: IC3.29 29.896,27.576 29.896,33.237 31.22,34.561 40.861,34.561 D3.2 43,33.297 40.996,31.293 40.996,19.62 C14.2
NetD1_2: D1.2 RE1.1 T1.1 | length 29.6
  Top Layer w0.635: D1.2 78,60.198 78.46,60.658 T1.1
  Bottom Layer w0.635: D1.2 81.74,57 RE1.1
NetD2_1: D2.1 IC3.11 R3.1 R6.2 | length 128.9
  Top Layer w0.635: R3.1 74.05,89.996 76.06,87.986 R6.2 76.06,71.24 D2.1
  Bottom Layer w0.635: IC3.11 5.664,33.126 5.664,48.285 8.738,51.359 32.131,51.359 37.592,56.82 65.52,56.82 D2.1
NetENC_2: ENC.2 IC3.37 Y1.2 Z3.2 | length 55.9
  Top Layer w0.635: v1(37.186,40.462) 39.801,37.847 44.145,37.847 46.38,35.611 Z3.2@46.38,16.81 ; Z3.2 Z3.2@46.38,16.81 ; ENC.2 55.575,20.075 55.575,19.05 53.475,16.95 Y1.2 49.047,16.81 Z3.2@46.38,16.81
  Bottom Layer w0.635: IC3.37 32.648,45 v1(37.186,40.462)
NetENC_3: ENC.3 IC3.38 Y3.2 Z5.2 | length 49.1
  Top Layer w0.635: Z5.2 53.442,46.81 53.532,46.9 Y3.2 57.215,46.9 v1(57.683,46.431)
  Bottom Layer w0.635: IC3.38 41.46,47.54 ENC.3 57.683,41.683 v1(57.683,46.431)
NetENC_5: ENC.5 IC3.39 Y2.2 Z4.2 | length 62.9
  Top Layer w0.635: v1(45.872,55.702) 47.244,54.331 47.244,49.505 46,48.261 Y2.2 43.091,47 42.901,46.81 Z4.2 38.733,46.81 38.733,44.138 44.729,44.138 50.971,37.897 56.103,37.897 ENC.5
  Bottom Layer w0.635: IC3.39 32.826,50.08 38.448,55.702 v1(45.872,55.702)
NetIC2_1: IC2.1 R11.1 R14.2 | length 27.9
  Top Layer w0.635: v1(74.905,17.501) 73.812,16.408 73.812,15.193 74.955,14.05 R11.1 ; v1(79.096,14.605) 81.305,12.395 84.171,12.395 86.316,10.25 R14.2
  Bottom Layer w0.635: v1(74.905,17.501) 74.905,18.796 ; IC2.1 74.905,18.796 ; v1(79.096,14.605) 74.905,18.796
NetIC2_2: IC2.2 R12.2 R15.2 | length 71.1
  Top Layer w0.635: IC2.2 73.689,21.514 66.675,21.514 65.938,20.777 65.938,19.355 72.73,12.563 76.865,12.563 79.178,10.25 R12.2 ; R15.2 95.246,5 98.501,8.255 v1(98.501,14.072)
  Bottom Layer w0.635: IC2.2 89.843,22.73 v1(98.501,14.072)
NetIC2_6: IC2.6 R1.2 R8.2 | length 35.8
  Top Layer w0.635: IC2.6 68.362,24.003 85.464,24.003 86.411,24.95 R8.2 R1.2
NetIC2_7: IC2.7 R1.1 R5.2 | length 53.8
  Top Layer w0.635: v1(101.854,21.463) 101.854,23.05 R1.1 ; R5.2 v1(103.327,9.71)
  Bottom Layer w0.635: IC2.7 68.266,23.901 94.285,23.901 101.854,16.332 ; v1(101.854,21.463) 101.854,16.332 ; v1(103.327,9.71) 103.327,14.859 101.854,16.332
NetIC3_1: IC3.1 R19.1 | length 76.4
  Top Layer w0.635: IC3.1 11.57,90.869 14.249,93.548 31.09,93.548 31.801,92.837 31.801,78.74 32.441,78.1 R19.1
NetIC3_2: IC3.2 K7.2 R16.2 | length 13.9
  Top Layer w0.635: K7.2 8.331,44.791 8.331,46.841 IC3.2 8,53.65 R16.2
NetIC3_7: IC3.7 K5.2 | length 4.6
  Bottom Layer w0.635: K5.2 9.195,37.54 9.355,37.38 IC3.7
NetIC3_8: IC3.8 K5.1 | length 4.6
  Bottom Layer w0.635: K5.1 9.195,35 9.355,34.84 IC3.8
NetIC3_12: IC3.12 K9.5 | length 4.8
  Bottom Layer w0.635: K9.5 11.096,25.154 IC3.12
NetIC3_13: IC3.13 K9.4 | length 4.8
  Bottom Layer w0.635: K9.4 11.096,22.614 IC3.13
NetIC3_14: IC3.14 K9.3 | length 4.8
  Bottom Layer w0.635: K9.3 11.096,20.074 IC3.14
NetIC3_15: IC3.15 K9.2 | length 4.8
  Bottom Layer w0.635: K9.2 11.096,17.534 IC3.15
NetIC3_16: IC3.16 K9.1 | length 4.8
  Bottom Layer w0.635: K9.1 11.096,14.994 IC3.16
NetIC3_19: IC3.19 R7.1 | length 145.8
  Top Layer w0.635: v1(4.318,69.088) 4.318,6.934 5.664,5.588 10.258,5.588 IC3.19 ; v1(72.746,72.263) 74.016,73.533 74.016,75.054 R7.1
  Bottom Layer w0.635: v1(4.318,69.088) 28.965,69.088 34.477,74.6 68.847,74.6 71.183,72.263 v1(72.746,72.263)
NetIC3_20: IC3.20 K4.1 | length 5.6
  Bottom Layer w0.635: K4.1 9.56,4.36 IC3.20
NetIC3_21: IC3.21 K4.2 | length 22.1
  Bottom Layer w0.635: K4.2 10.821,5.639 25.721,5.639 IC3.21
NetIC3_22: IC3.22 K4.3 | length 22.1
  Bottom Layer w0.635: K4.3 10.745,8.255 25.645,8.255 IC3.22
NetIC3_23: IC3.23 K6.3 | length 6.2
  Bottom Layer w0.635: IC3.23 27.44,9 K6.3
NetIC3_24: IC3.24 K6.2 | length 8.8
  Top Layer w0.635: IC3.24 31.623,7.357 31.623,6.46 K6.2
NetIC3_27: IC3.27 K11.1 | length 10.2
  Bottom Layer w0.635: IC3.27 31.004,15.596 33.676,15.596 K11.1
NetIC3_28: IC3.28 K11.4 | length 6.6
  Bottom Layer w0.635: IC3.28 29.78,22.14 K11.4
NetIC3_30: IC3.30 K11.5 | length 32.8
  Top Layer w0.635: IC3.30 25.836,26.056 25.836,23.516 29.185,23.516 30.785,25.117 30.785,32.126 32.331,33.672 34.019,33.672 35,32.691 K11.5
NetIC3_33: IC3.33 K10.2 | length 12.2
  Bottom Layer w0.635: IC3.33 33.02,34.84 34.341,33.519 34.341,31.152 K10.2
NetIC3_34: IC3.34 K10.1 | length 19.3
  Bottom Layer w0.635: IC3.34 35.213,37.38 35.23,37.363 35.23,29.501 K10.1
NetIC3_35: IC3.35 R22.2 TM1637.17 | length 126.8
  Top Layer w0.635: IC3.35 30.217,36.703 33.528,36.703 33.95,37.125 R22.2
  Bottom Layer w0.635: IC3.35 25.832,41.088 25.832,48.819 70.536,48.819 73.228,51.511 73.228,61.228 79.264,67.265 80.036,67.265 80.036,71 77.305,73.73 72.883,73.73 64.444,82.169 49.549,82.169 TM1637.17
NetIC3_36: IC3.36 R21.2 TM1637.18 | length 101.3
  Top Layer w0.635: v1(24.13,57.175) 24.13,45.33 IC3.36 28.304,43.764 33.02,43.764 33.95,42.834 R21.2
  Bottom Layer w0.635: v1(24.13,57.175) 12.217,57.175 3.353,66.04 3.353,69.977 5.08,71.704 29.355,71.704 31.532,73.881 31.532,76.007 34.214,78.689 43.529,78.689 TM1637.18
NetK2_2: K2.2 RE1.2 RE1.4 | length 72.6
  Top Layer w0.254: v2@71.984,95.984 v2(72,96)
  Top Layer w0.635: RE1.2 96.622,60.622 96.622,67.458 RE1.4
  Top Layer w1.27: K2.2 67,90 71.984,94.984 v2@71.984,95.984
  Bottom Layer w1.27: v2(72,96) 93.111,96 99,90.111 99,73.08 RE1.4
NetK3_2: K3.2 R2.1 R4.2 R9.2 R13.2 | length 221.5
  Top Layer w0.635: K3.2 14.127,95.127 40.788,95.127 44.475,91.44 44.475,71.984 42.291,69.799 42.291,64.618 39.903,62.23 39.903,51.74 37.844,49.681 37.844,43.055 42.163,38.736 44.881,38.736 50.8,32.817 50.8,21.717 52.07,20.447 53.289,20.447 56.337,23.495 58.674,23.495 68.65,13.519 68.65,10.852 74.332,5.17 R13.2 91.098,5.17 94.501,8.572 95.415,8.572 96.52,9.677 ; R2.1 85.114,13.43 87.266,11.278 89.154,11.278 ; R9.2 88.99,20.41 87.732,19.152 87.732,12.7 89.154,11.278 ; R4.2 100.482,19.87 97.307,16.695 97.307,10.465 96.52,9.677 ; 89.154,11.278 93.65,11.278 95.25,9.677 96.52,9.677
NetK8_1: K8.1 L2.3 | length 9.5
  Bottom Layer w1.27: 8,74 L2.3
NetK8_2: K8.2 L2.2 | length 11.9
  Bottom Layer w1.27: K8.2 10.374,81.62 L2.2
NetL2_4: L2.4 T3.2 | length 12.7
  Bottom Layer w0.254: 20,73 L2.4
  Bottom Layer w1.27: L2.4 24.206,78.206 T3.2
NetLD1_1: LD1.1 LD1.6 LD1.10 TM1637.6 | length 82.9
  Top Layer w0.635: TM1637.6 52.603,72.363 52.603,59.087 LD1.6
  Bottom Layer w0.635: LD1.10 47.528,51.758 39.903,51.758 39.903,53.34 39.218,54.026 38.029,54.026 37.343,53.34 37.343,50.516 38.1,49.759 60.96,49.759 62.472,51.27 62.472,52.705 ; LD1.6 59.956,54.026 62.472,54.026 62.472,52.705 ; LD1.1 70.37,51.74 63.437,51.74 62.472,52.705
NetLD1_2: LD1.2 LD1.7 LD1.11 TM1637.5 | length 68
  Top Layer w0.635: TM1637.5 52.976,75.276 66.025,75.276 70.104,71.196 70.104,54.014 LD1.2 66.959,50.869 58.281,50.869 LD1.7
  Bottom Layer w0.635: LD1.11 46.402,52.88 47.523,54.002 52.312,54.002 52.312,52.055 52.608,51.758 55.148,51.758 LD1.7
NetLD1_3: LD1.3 TM1637.15 | length 53.4
  Bottom Layer w0.635: TM1637.15 58.92,75.54 69.406,75.54 71.501,73.444 71.556,73.444 72,73 76.593,73 79.147,70.447 79.147,68.154 78.263,68.154 66.43,56.321 LD1.3
NetLD1_4: LD1.4 LD1.8 LD1.13 TM1637.4 | length 61.8
  Top Layer w0.635: v1(55.016,70.968) 55.016,65.634 60.228,60.422 60.228,51.758 62.768,51.758 LD1.4
  Bottom Layer w0.635: LD1.13 42.735,54.585 46.639,54.585 46.945,54.891 52.705,54.891 53.73,53.866 LD1.8 56.73,55.88 62.847,55.88 63.89,54.837 LD1.4 ; TM1637.4 50.632,70.968 v1(55.016,70.968)
NetLD1_5: LD1.5 LD1.9 LD1.14 TM1637.9 | length 49.3
  Top Layer w0.635: TM1637.9 62.586,71.714 62.586,54.116 LD1.5
  Bottom Layer w0.635: LD1.14 38.886,52.484 38.886,50.869 49.179,50.869 LD1.9 51.19,51.75 52.07,50.869 59.339,50.869 LD1.5
NetLD1_12: LD1.12 LD1.22 LD1.28 TM1637.8 | length 60.6
  Top Layer w0.635: LD1.12 43.57,56.397 v1(46.863,59.69) ; LD1.22 58.54,70.39 TM1637.8
  Bottom Layer w0.635: v1(46.863,59.69) 63.08,59.69 LD1.28 67.824,71.806 59.956,71.806 LD1.22
NetLD1_15: LD1.15 LD1.20 LD1.24 TM1637.3 | length 30.4
  Bottom Layer w0.635: LD1.15 38.49,68.837 40.29,70.637 43.257,70.637 TM1637.3 49.361,69.699 49.611,69.699 LD1.20 52.463,69.393 54.204,69.393 55.016,68.58 55.016,66.98 60.21,66.98 LD1.24
NetLD1_16: LD1.16 LD1.21 LD1.25 TM1637.2 | length 32.8
  Top Layer w0.635: LD1.16 41.03,70.95 TM1637.2
  Bottom Layer w0.635: LD1.16 42.17,66.98 52.59,66.98 LD1.21 53.73,66.347 54.291,65.786 61.556,65.786 LD1.25
NetLD1_17: LD1.17 LD1.23 LD1.27 TM1637.7 | length 61.2
  Top Layer w0.635: TM1637.7 57.167,74.387 59.055,74.387 59.715,73.726 59.715,69.025 LD1.23
  Bottom Layer w0.635: LD1.17 42.323,69.367 40.64,69.367 39.903,68.631 39.903,65.405 40.64,64.668 65.518,64.668 LD1.27 66.453,70.637 61.327,70.637 LD1.23
NetLD1_18: LD1.18 TM1637.13 | length 23.1
  Top Layer w0.635: LD1.18 47.25,66.98 49.784,66.98 49.784,72.314 49.733,72.365 49.733,74.397 54.839,79.502 57.042,79.502 TM1637.13
NetLD1_19: LD1.19 TM1637.14 | length 24.4
  Top Layer w0.635: LD1.19 47.015,69.755 47.015,81.915 47.65,82.55 54.45,82.55 TM1637.14
NetR7_2: R7.2 R10.1 T1.2 | length 20.5
  Top Layer w0.635: R10.1 70.399,75.054 ; R7.2 73,76.954 70.79,75.054 70.399,75.054 ; T1.2 73.77,71.31 71.793,71.31 71.793,73.66 70.399,75.054
NetR11_2: R11.2 R12.1 | length 14.5
  Top Layer w0.635: R11.2 77.318,15.95 77.318,14.503 80.315,11.506 83.282,11.506 83.517,11.272 83.517,8.35 R12.1
NetR17_1: R17.1 T2.2 T4.1 T5.2 | length 34.6
  Top Layer w0.635: T5.2 22.885,91.845 22.885,90.881 27.085,90.881 28.05,91.846 R17.1
  Bottom Layer w0.635: T2.2 22.73,90.35 T5.2 22.73,92.631 24.079,93.98 26.111,93.98 29.631,90.46 T4.1
NetR18_1: R18.1 T2.3 T5.3 | length 15.7
  Top Layer w0.635: R18.1 v1(21.05,88.189)
  Bottom Layer w0.635: v1(21.05,88.189) 17.811,88.189 T2.3 22.884,89 24,90.116 T5.3
NetR18_2: R18.2 T3.1 | length 13.7
  Top Layer w0.635: R18.2 22.95,82.462 T3.1
NetR19_2: R19.2 R20.1 T4.2 | length 26.6
  Top Layer w0.635: R19.2 33.1,80.9 R20.1 33.409,94.238 40.259,94.238 40.259,91.73 T4.2
VIN: B1.1 C1.1 R3.2 R17.2 T2.1 T3.3 | length 162.2
  Top Layer w1.27: R17.2 29.975,91.975 29.975,81.025 T3.3 ; R3.2 75.95,89.81 81.76,84 C1.1 v1(84.758,81.758) 83.49,80.49 83.49,37.73 B1.1
  Bottom Layer w1.27: T2.1 19.688,83.645 27.355,83.645 T3.3 32,83 35.629,83 46.629,94 67.341,94 77.341,84 C1.1
pads on no net: ENC.MP1 ENC.MP2 IC3.3 IC3.4 IC3.25 IC3.26 IC3.40 LD1.26 RE1.7 TM1637.10 TM1637.11 TM1637.12 TM1637.19 TM1637.20

## Other copper
Top Layer:
  text "Soldeerstation v1.0 / Benjie Van Limbergen / 05/2022" at 43,2 h1.52

## Text inside footprints (layer, text, board x,y; h text height)
K11: Top Overlay "1" at 35.508,14.888 h1.27 r90; Top Overlay "2" at 32.968,14.38 h1.27 r90; Top Overlay "5" at 35.508,23.524 h1.27 r90; Top Overlay "6" at 32.968,23.524 h1.27 r90